# EAGLE board Board (EAGLE 6.3)
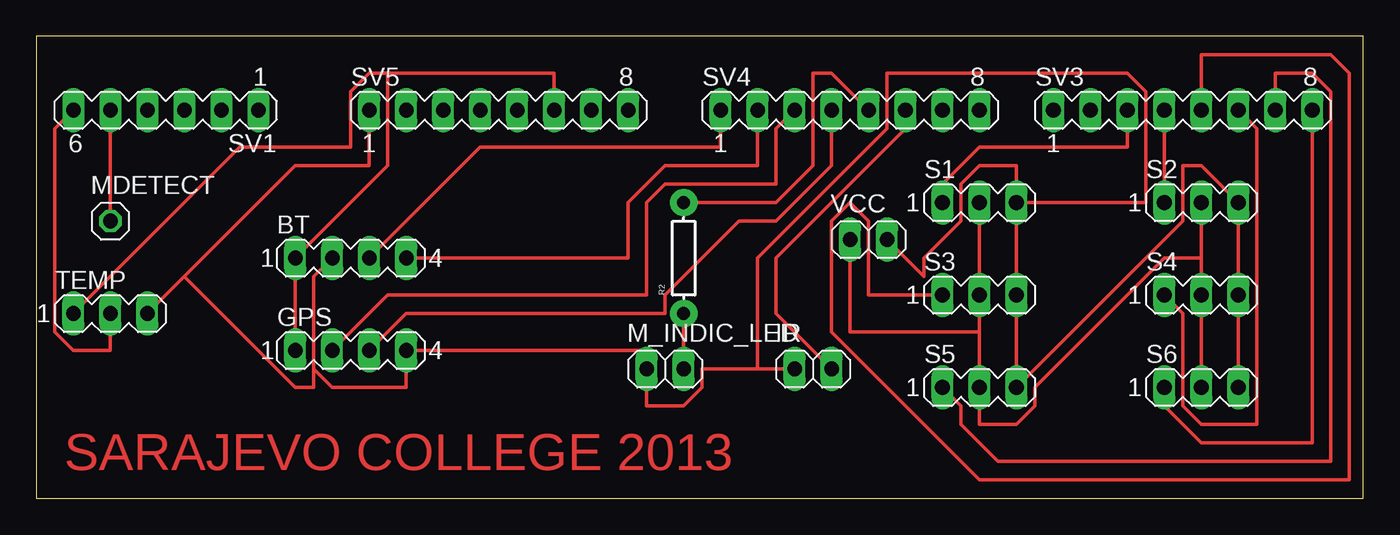
[diagram p0: board, top side]

Size 91.11 x 31.74 mm. Coordinates in mm from the lower left corner, seen from the top.
Outline: 0,0 91.11,0 91.11,31.74 0,31.74 0,0
Copper layers (1*16): Top 0.035mm / dielectric 1.5mm / Bottom 0.035mm
Design rules "default *": minimum track width 10mil, minimum drill 50mil, track to track 8mil, track to pad 8mil, pad to pad 8mil, via to via 8mil, smd to smd 8mil, copper to edge 40mil, drill to drill 8mil, minimum pad ring 10mil, minimum via ring 8mil, stop-mask expansion 4mil, vias tented up to drill 0mil, thermal gap 10mil

## Footprints (pad centres in the part's own frame; a part is rotated, then mirrored left to right if it is on the bottom)
MA04-1 = drill 1.016 long: 1 -3.81,0; 2 -1.27,0; 3 1.27,0; 4 3.81,0
1X02 = drill 1.016 long: 1 -1.27,0; 2 1.27,0
1X01 = drill 1.016 octagon: 1 0,0
AXIAL-0.3 = drill 0.9 pad 1.88: P$1 -3.81,0; P$2 3.81,0
MA03-1 = drill 1.016 long: 1 -2.54,0; 2 0,0; 3 2.54,0
MA06-1 = drill 1.016 long: 1 -6.35,0; 2 -3.81,0; 3 -1.27,0; 4 1.27,0; 5 3.81,0; 6 6.35,0
MA08-1 = drill 1.016 long: 1 -8.89,0; 2 -6.35,0; 3 -3.81,0; 4 -1.27,0; 5 1.27,0; 6 3.81,0; 7 6.35,0; 8 8.89,0

## Placement (x,y rotation side)
BT  [MA04-1]  21.59,16.51 0 top
GPS  [MA04-1]  21.59,10.16 0 top
IR  [1X02]  53.34,8.89 0 top
M_INDIC_LED  [1X02]  43.18,8.89 0 top
MDETECT  [1X01]  5.08,19.05 0 top
R2  [AXIAL-0.3]  44.45,16.51 90 top
S1  [MA03-1]  64.77,20.32 0 top
S2  [MA03-1]  80.01,20.32 0 top
S3  [MA03-1]  64.77,13.97 0 top
S4  [MA03-1]  80.01,13.97 0 top
S5  [MA03-1]  64.77,7.62 0 top
S6  [MA03-1]  80.01,7.62 0 top
SV1  [MA06-1]  8.89,26.67 180 top
SV3  [MA08-1]  78.74,26.67 0 top
SV4  [MA08-1]  55.88,26.67 0 top
SV5  [MA08-1]  31.75,26.67 0 top
TEMP  [MA03-1]  5.08,12.7 0 top
VCC  [1X02]  57.15,17.78 0 top

## Library data of the parts
BT GPS S1-S6 SV1 SV3-SV5 TEMP = con-lstb; OC_FARNELL: unknown; OC_NEWARK: unknown
IR M_INDIC_LED MDETECT VCC = pinhead
R2 = SparkFun-Passives

## Nets
N$1: S1.1 SV3.3
N$2: BT.1 GPS.1 SV5.6 TEMP.1
N$4: S2.1 SV3.4
N$5: S3.1 SV3.5
N$6: S4.1 SV3.6
N$7: S5.1 SV3.7
N$8: S6.1 SV3.8
N$9: BT.2 GPS.4 IR.1 M_INDIC_LED.1 S1.3 S2.3 S3.3 S4.3 S5.3 S6.3 SV5.1 TEMP.3 VCC.2
N$11: SV1.6 TEMP.2
N$12: BT.4 SV4.2
N$13: MDETECT.1 SV1.5
N$14: M_INDIC_LED.2 R2.P$1
N$15: S1.2 S2.2 S3.2 S4.2 S5.2 S6.2 VCC.1
N$18: R2.P$2 SV4.5
N$19: IR.2 SV4.6
N$24: BT.3 SV4.1
N$25: GPS.2 SV4.3
N$26: GPS.3 SV4.4

## Tracks (layer width: path | path; a pad name or v marks a point on that pad's centre or on a via)
N$1
  Top 0.254: S1.1 62.23,21.59 64.77,24.13 74.93,24.13 SV3.3
N$2
  Top 0.254: GPS.1 BT.1 24.13,22.86 24.13,29.21 | TEMP.1 13.97,24.13 21.59,24.13 21.59,27.94 22.86,29.21 24.13,29.21 | 24.13,29.21 35.56,29.21 SV5.6
N$4
  Top 0.254: SV3.4 S2.1
N$5
  Top 0.254: S3.1 57.15,13.97 57.15,19.05 55.88,20.32 54.61,19.05 54.61,11.43 64.77,1.27 90.17,1.27 90.17,29.21 88.9,30.48 80.01,30.48 SV3.5
N$6
  Top 0.254: S4.1 78.74,12.7 78.74,6.35 80.01,5.08 83.82,5.08 83.82,25.4 SV3.6
N$7
  Top 0.254: S5.1 63.5,6.35 63.5,5.08 66.04,2.54 88.9,2.54 88.9,27.94 87.63,29.21 85.09,29.21 SV3.7
N$8
  Top 0.254: S6.1 77.47,6.35 80.01,3.81 87.63,3.81 SV3.8
N$9
  Top 0.254: S6.3 S4.3 S2.3 80.01,22.86 78.74,22.86 78.74,19.05 S5.3 S3.3 S1.3 | VCC.2 60.96,15.24 60.96,16.51 63.5,19.05 63.5,21.59 64.77,22.86 67.31,22.86 S1.3 | 10.16,15.24 17.78,22.86 22.86,22.86 SV5.1 | 10.16,15.24 TEMP.3 | 49.53,8.89 45.72,8.89 45.72,7.62 44.45,6.35 41.91,6.35 M_INDIC_LED.1 41.91,10.16 GPS.4 25.4,7.62 20.32,7.62 19.05,8.89 | 49.53,8.89 IR.1 | BT.2 19.05,15.24 19.05,8.89 | 10.16,15.24 17.78,7.62 19.05,7.62 19.05,8.89 | S1.3 76.2,20.32 76.2,27.94 74.93,29.21 58.42,29.21 58.42,25.4 49.53,16.51 49.53,8.89
N$11
  Top 0.254: SV1.6 1.27,25.4 1.27,11.43 2.54,10.16 5.08,10.16 TEMP.2
N$12
  Top 0.254: BT.4 40.64,16.51 40.64,20.32 43.18,22.86 49.53,22.86 SV4.2
N$13
  Top 0.254: SV1.5 MDETECT.1
N$14
  Top 0.254: R2.P$1 M_INDIC_LED.2
N$15
  Top 0.254: 64.77,11.43 S3.2 S1.2 | 64.77,11.43 S5.2 64.77,5.08 67.31,5.08 68.58,6.35 68.58,7.62 77.47,16.51 80.01,16.51 | VCC.1 55.88,11.43 64.77,11.43 | S6.2 S4.2 80.01,16.51 | 80.01,16.51 S2.2
N$18
  Top 0.254: SV4.5 54.61,29.21 53.34,29.21 53.34,22.86 50.8,20.32 R2.P$2
N$19
  Top 0.254: IR.2 50.8,12.7 50.8,16.51 59.69,25.4 SV4.6
N$24
  Top 0.254: BT.3 30.48,24.13 46.99,24.13 SV4.1
N$25
  Top 0.254: GPS.2 24.13,13.97 41.91,13.97 41.91,20.32 43.18,21.59 50.8,21.59 50.8,25.4 SV4.3
N$26
  Top 0.254: GPS.3 25.4,12.7 43.18,12.7 43.18,13.97 48.26,19.05 50.8,19.05 54.61,22.86 SV4.4

## Text on the board
Top: SARAJEVO COLLEGE 2013